# Altium PCB mcu.PcbDoc
Units mil, origin at the board's own origin, x right, y up, seen from the top; angles counter-clockwise.
Board outline 1250 x 1250 mil, 2 copper layers (Top Layer, Bottom Layer); 8 components, 33 nets, 70 pads, 0 vias.
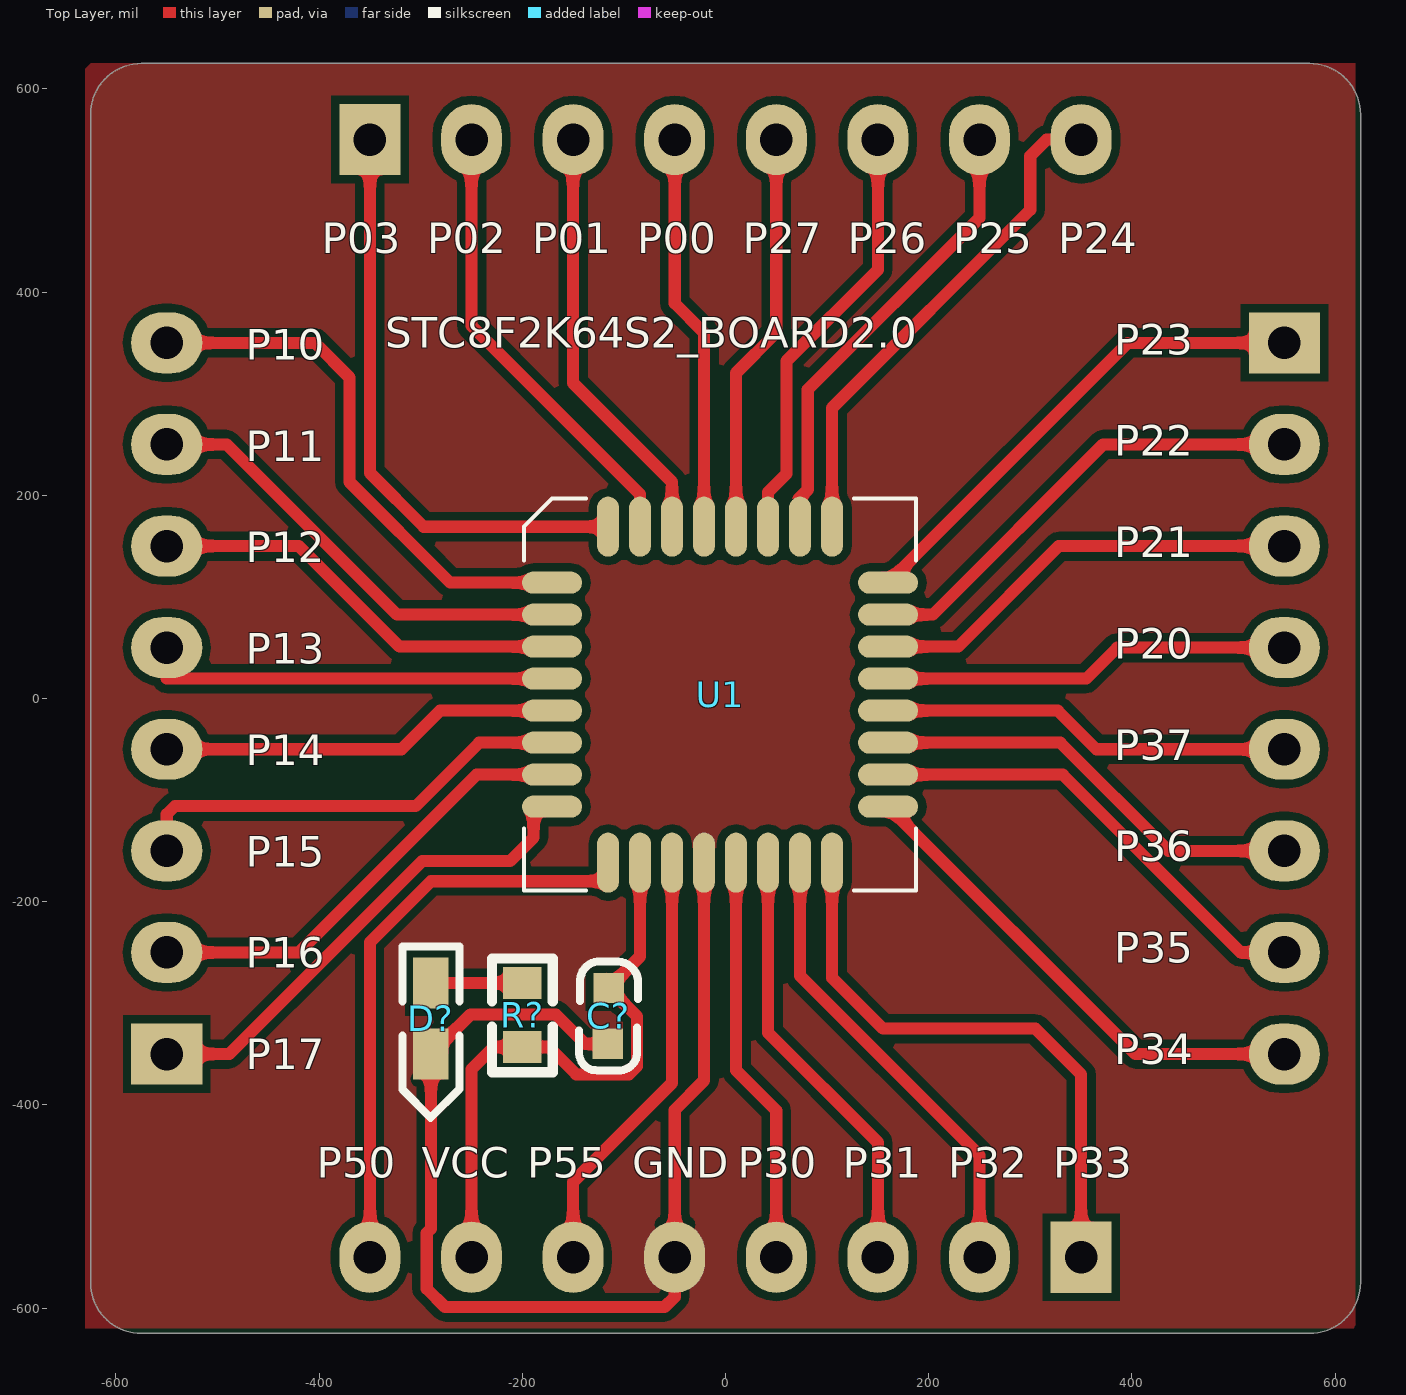
[diagram p0: Top Layer view]
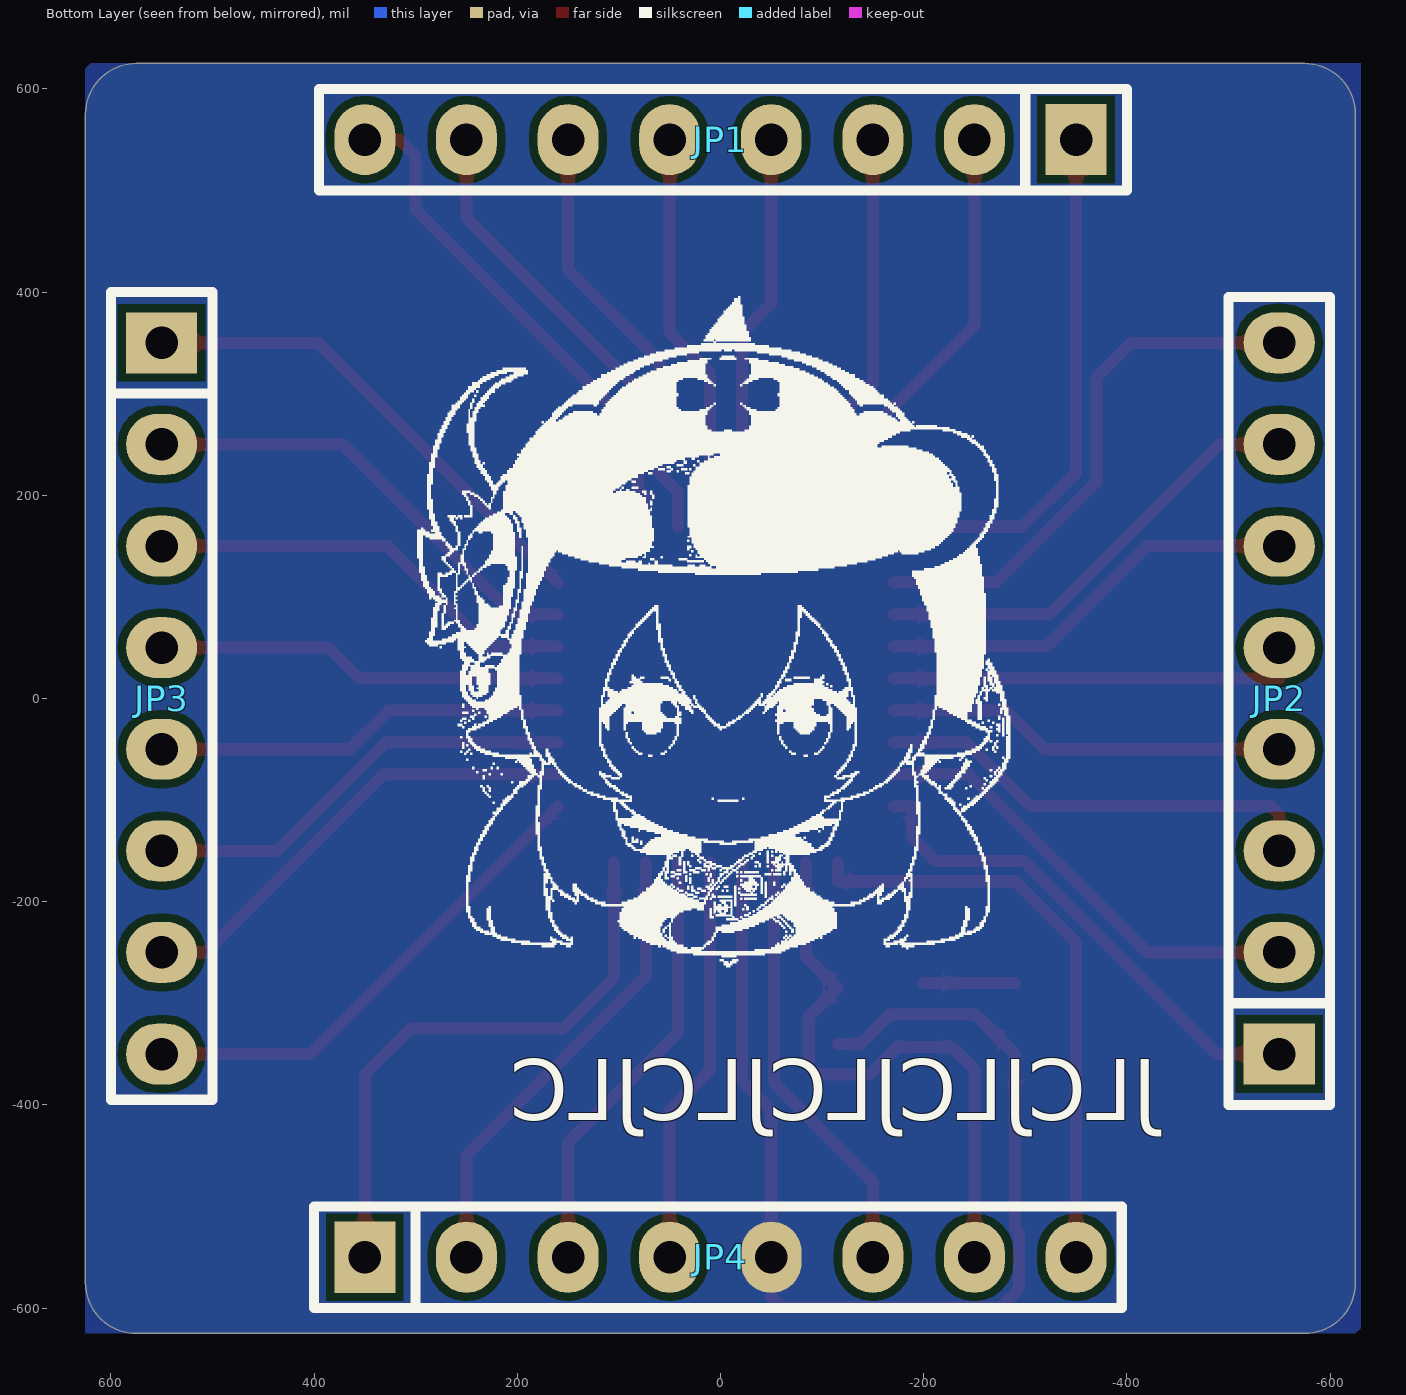
[diagram p1: Bottom Layer view, seen from below]
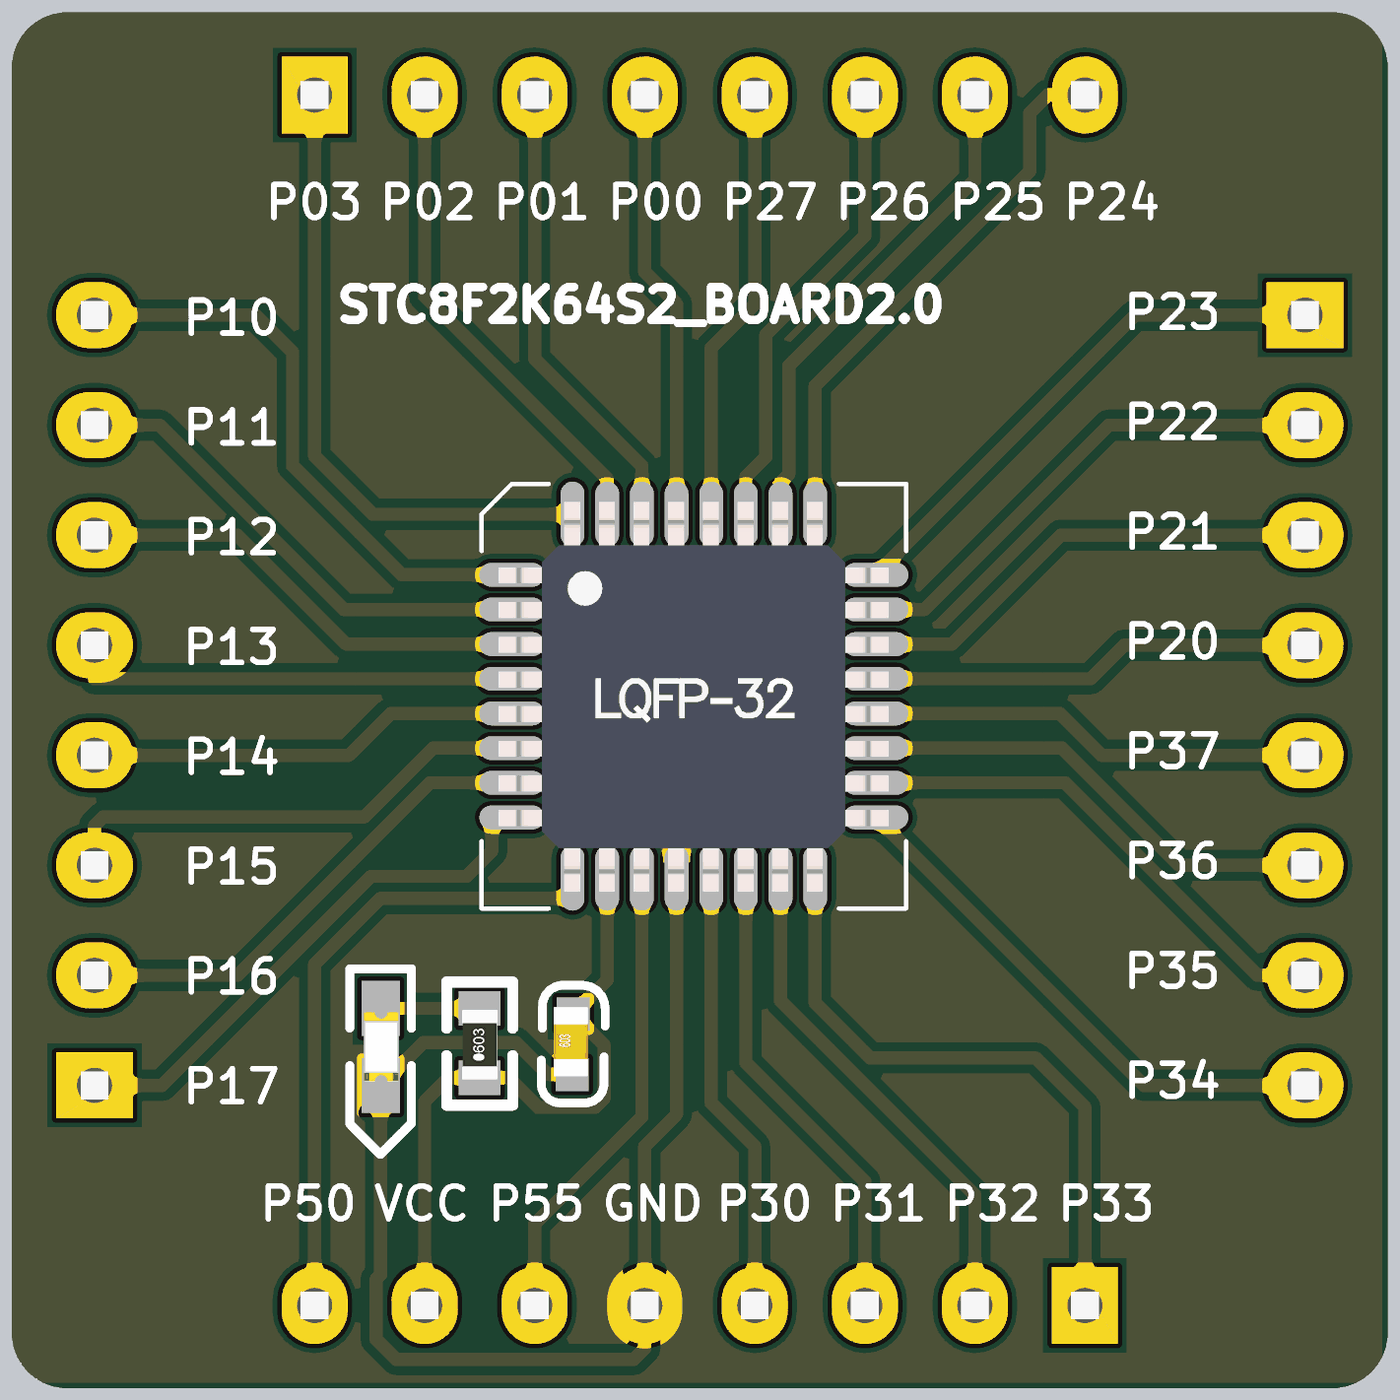
[diagram p2: 3D render of the assembled board from above, using the file's embedded part models]
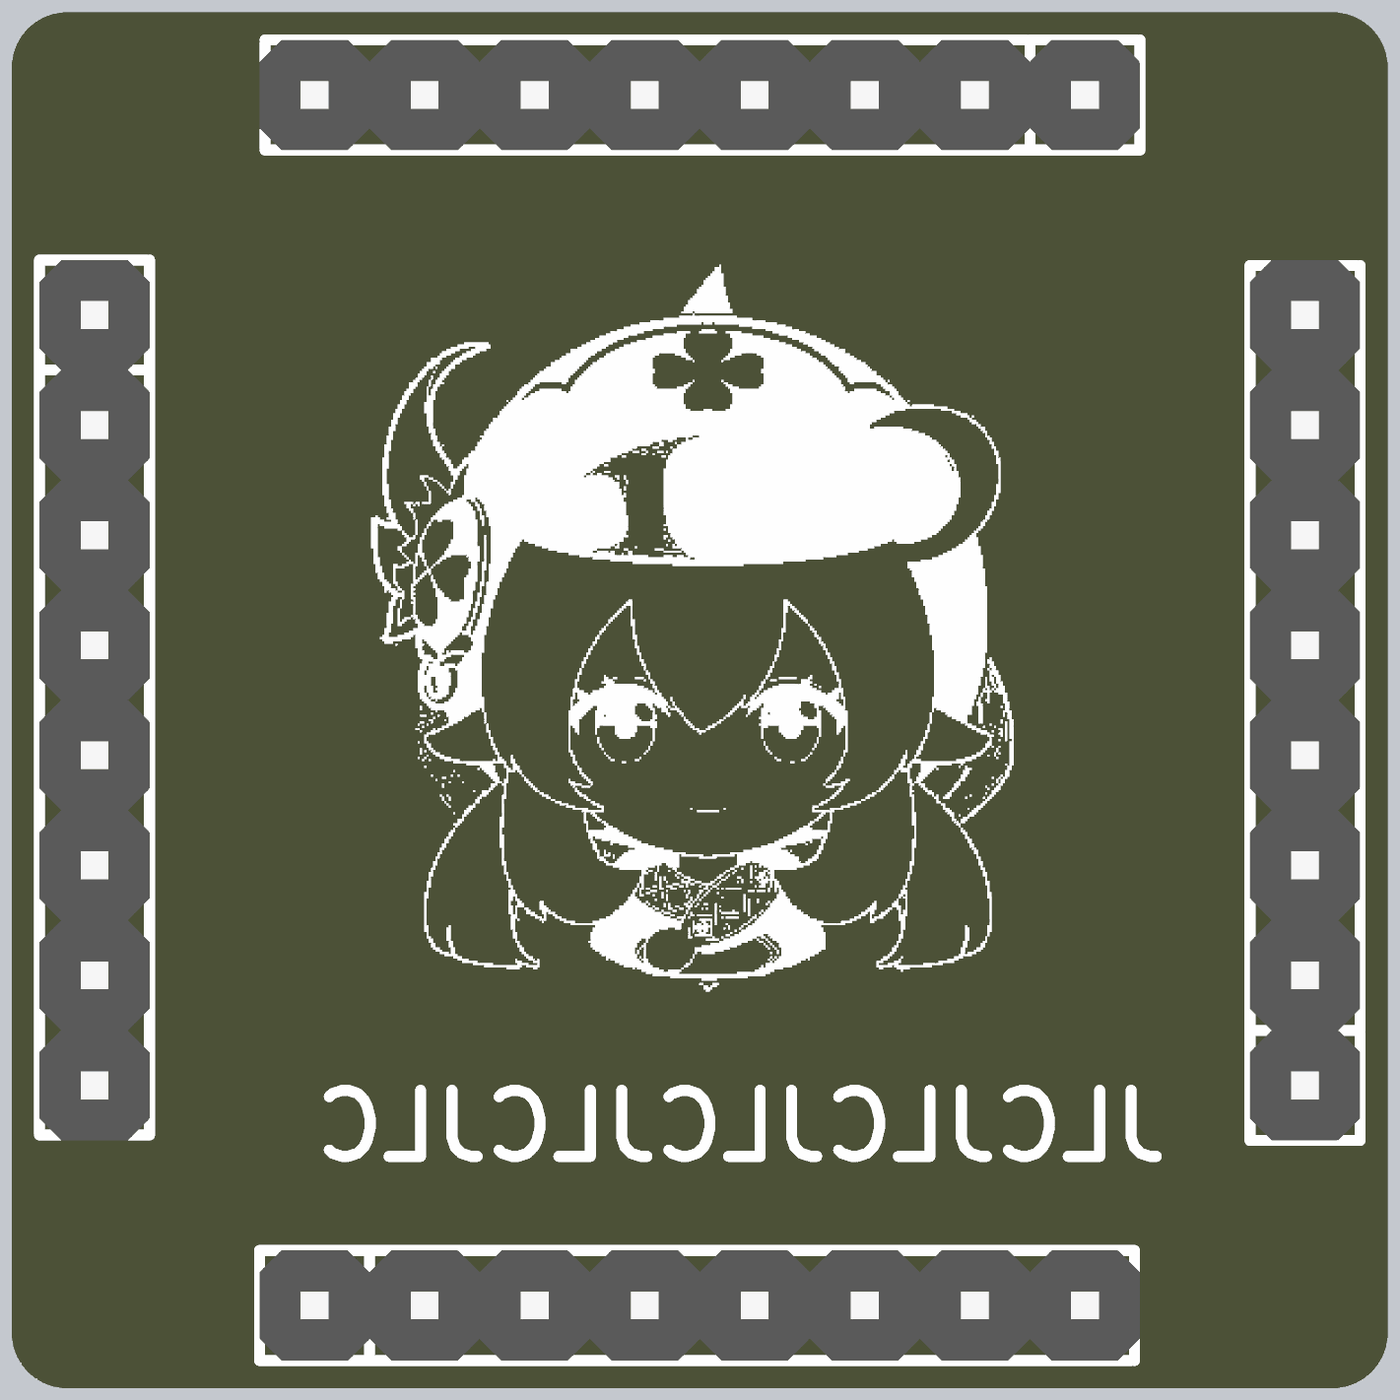
[diagram p3: 3D render of the assembled board from below, using the file's embedded part models]

## Layer stack, top to bottom
Top Solder: solder mask 0.4, Solder Resist, Dk 3.5
Top Layer: signal copper 1.4
Dielectric 1: dielectric 12.6, FR-4, Dk 4.8
Bottom Layer: signal copper 1.4
Bottom Solder: solder mask 0.4, Solder Resist, Dk 3.5

## Board outline
-625,-575 -625,575 cw(c-575,575) -575,625 575,625 cw(c575,575) 625,575 625,-575 cw(c575,-575) 575,-625 -575,-625 cw(c-575,-575)

## Design rules (kind name [scope] priority, off if disabled: settings)
Clearance [All] p1: gap=8 ignorepadtopadclearanceinfootprint=TRUE
PolygonConnect [All] p1: connectstyle=Direct reliefconductorwidth=10 reliefentries=4 polygonreliefangle="90 Angle" airgapwidth=10
RoutingVias [All] p1: holewidth=28 width=50 viastyle="Through Hole" minholewidth=28 minwidth=50 maxholewidth=28 maxwidth=50
SolderMaskExpansion [All] p1: expansion=4 istentingtop=FALSE
Width [All] p1: maxlimit=100 minlimit=8 preferedwidth=12
30 further rules are at their usual default settings.

## Components (designator, comment, footprint, x,y, rotation, side; value= is the part's Value field where it differs from the comment)
C? "CAP" 0603C -116.35,-340.21 r90 top
D? "LED" LED-0603W -290.26,-280 r270 top
JP1 "HDR-1X8" "Pin HDR1X8/2.54mm-S" -350,550 r270 bottom locked
JP2 "HDR-1X8" "Pin HDR1X8/2.54mm-S" -550,-350 r0 bottom locked
JP3 "HDR-1X8" "Pin HDR1X8/2.54mm-S" 550,350 r180 bottom locked
JP4 "HDR-1X8" "Pin HDR1X8/2.54mm-S" 350,-550 r90 bottom locked
R? "RES" 0603R -200,-342.99 r90 top
U1 "STC8F2K64S2_LQFP32" LQFP32 -170.71,113.98 r0 top

## Footprints (in the part's own frame and the unit in brackets; to place one, negate y for a bottom-side part, rotate by r counter-clockwise, add the part's x,y. Pads: shape width x height; smd on the part's side, far side on the other; paste and mask are expansions set on the pad)
0603C [mil]
  rect 30x30 smd: 1(0.21,-0.35) 2(55.21,-1.35)
  silkscreen extent -26,-30 81,28, body extent -1,-15 62,17, height 12
0603R [mm]
  rect 0.8x0.965 smd: 1(0,0) 2(1.6,0)
  silkscreen extent -0.64,-0.76 2.21,0.76, body extent -0.04,-0.41 1.56,0.41, height 0.45
LED-0603W [mil]
  rect 50x35 smd: A(0,0.26) K(70,0.26)
  silkscreen extent -36,-28 133,28, body extent 4,-15 66,17, height 24
LQFP32 [mm]
  oval 1.5x0.55 smd: 1(0,0) 2(0,-0.8) 3(0,-1.6) 4(0,-2.4) 5(0,-3.2) 6(0,-4) 7(0,-4.8) 8(0,-5.6) 17(8.4,-5.6) 18(8.4,-4.8) 19(8.4,-4) 20(8.4,-3.2) 21(8.4,-2.4) 22(8.4,-1.6) 23(8.4,-0.8) 24(8.4,0)
  oval 0.55x1.5 smd: 9(1.4,-7) 10(2.2,-7) 11(3,-7) 12(3.8,-7) 13(4.6,-7) 14(5.4,-7) 15(6.2,-7) 16(7,-7) 25(7,1.4) 26(6.2,1.4) 27(5.4,1.4) 28(4.6,1.4) 29(3.8,1.4) 30(3,1.4) 31(2.2,1.4) 32(1.4,1.4)
  silkscreen extent -0.7,-7.7 9.1,2.1, body extent -0.31,-7.32 8.69,1.68, height 1.63
"Pin HDR1X8/2.54mm-S" [mil]
  rect 70x60 hole 32: 1(0,0)
  oval 70x60 hole 32: 2(0,-100) 3(0,-200) 4(0,-300) 5(0,-400) 6(0,-500) 7(0,-600) 8(0,-700)
  silkscreen extent -50,-745 50,50, body extent -50,-750 50,50, height 336

## Part data
C?: "无极性电容"
JP1 JP2 JP3 JP4: library part "Header 8", "8P接插件", BOM名称=8P接插件, 学习资源=https://shop463601444.taobao.com, 版权归属="封装库来自淘宝 ID：黄晶宝石"

## Nets (pads, with @x,y where several pads share a name; then routed paths per layer and width w, separated by ;. In a path a pad name is that pad's centre, name@x,y a point inside that pad or via, vN(x,y) a via of type N, cw(c..) or ccw(c..) an arc to the next point about the centre after c; other vN are vias at no path point)
GND: C?.1 D?.K JP4.5 U1.12 | length 1129.8
  Top Layer w12: C?.1 -138,-340 -167,-311 -251,-311 D?.K -290,-522 -294,-526 -294,-581 -276,-599 -60,-599 -50,-589 JP4.5 -50,-405 -21.1,-376.1 U1.12
NetD?_A: D?.A R?.2 | length 90
  Top Layer w12: D?.A R?.2
P00: JP1.4 U1.29 | length 392.9
  Top Layer w12: JP1.4 -50,388.9 -21.1,360 U1.29
P01: JP1.3 U1.30 | length 421.3
  Top Layer w12: JP1.3 -150,310.4 -52.6,213 U1.30
P02: JP1.2 U1.31 | length 449.6
  Top Layer w12: JP1.2 -250,366.91 -84.09,201 U1.31
P03: JP1.1 U1.32 | length 584.5
  Top Layer w12: JP1.1 -350,222 -297,169 -115.59,169 U1.32
P10: JP2.8 U1.1 | length 537.4
  Top Layer w12: JP2.8 -404,350 -370,316 -370,213 -270.98,113.98 U1.1
P11: JP2.7 U1.2 | length 448.7
  Top Layer w12: JP2.7 -491,250 -323.48,82.48 U1.2
P12: JP2.6 U1.3 | length 420.3
  Top Layer w12: JP2.6 -420,150 -320.98,50.98 U1.3
P13: JP2.5 U1.4 | length 409.8
  Top Layer w12: JP2.5 -550,19.49 U1.4
P14: JP2.4 U1.5 | length 395
  Top Layer w12: JP2.4 -319,-50 -281.01,-12.01 U1.5
P15: JP2.3 U1.6 | length 444.5
  Top Layer w12: JP2.3 -550,-114 -542,-106 -305,-106 -242.5,-43.5 U1.6
P16: JP2.2 U1.7 | length 451.8
  Top Layer w12: JP2.2 -420,-250 -245,-75 U1.7
P17: JP2.1 U1.8 | length 498
  Top Layer w12: JP2.1 -488.5,-350 -298.5,-160 -212,-160 -189,-137 -189,-106.5 U1.8
P20: JP3.4 U1.21 | length 402.6
  Top Layer w12: U1.21 355,19.49 385.51,50 JP3.4
P21: JP3.3 U1.22 | length 431
  Top Layer w12: U1.22 228.98,50.98 328,150 JP3.3
P22: JP3.2 U1.23 | length 459.4
  Top Layer w12: U1.23 204,82.48 371.52,250 JP3.2
P23: JP3.1 U1.24 | length 487.8
  Top Layer w12: U1.24 396.02,350 JP3.1
P24: JP1.8 U1.25 | length 502.4
  Top Layer w12: U1.25 104.88,285.94 300,481.06 300,534 316,550 JP1.8
P25: JP1.7 U1.26 | length 454.1
  Top Layer w12: U1.26 73.39,198.1 81,205.71 81,304 250,473 JP1.7
P26: JP1.6 U1.27 | length 425.7
  Top Layer w12: U1.27 41.89,203 60.05,221.16 60.05,332.05 150,422 JP1.6
P27: JP1.5 U1.28 | length 397.3
  Top Layer w12: U1.28 10.39,320.39 50,360 JP1.5
P30: JP4.4 U1.13 | length 404.8
  Top Layer w12: U1.13 10.39,-366 50,-405.61 JP4.4
P31: JP4.3 U1.14 | length 433.2
  Top Layer w12: U1.14 41.89,-329 150,-437.11 JP4.3
P32: JP4.2 U1.15 | length 461.5
  Top Layer w12: U1.15 73.39,-273 250,-449.61 JP4.2
P33: JP4.1 U1.16 | length 577.9
  Top Layer w12: U1.16 104.88,-275 154.88,-325 305,-325 350,-370 JP4.1
P34: JP3.8 U1.17 | length 490.9
  Top Layer w12: U1.17 403.5,-350 JP3.8
P35: JP3.7 U1.18 | length 462.5
  Top Layer w12: U1.18 332,-75 507,-250 JP3.7
P36: JP3.6 U1.19 | length 434.1
  Top Layer w12: U1.19 329.5,-43.5 436,-150 JP3.6
P37: JP3.5 U1.20 | length 405.7
  Top Layer w12: U1.20 327.01,-12.01 365,-50 JP3.5
P54: JP4.8 U1.9 | length 587.6
  Top Layer w12: JP4.8 -350,-240 -290,-180 -115.59,-180 U1.9
P55: JP4.6 U1.11 | length 428.7
  Top Layer w12: JP4.6 -150,-476 -52.6,-378.6 U1.11
VCC: C?.2 JP4.7 R?.1 U1.10 | length 596.4
  Top Layer w12: JP4.7 -250,-364.99 -228,-342.99 R?.1 -174.01,-342.99 -147,-370 -95,-370 -87,-362 -87,-313 C?.2 -84.09,-254.09 U1.10

## Polygon pours and split planes (outlines as drawn)
GND on Top Layer "GND_L01_P000" (solid, remove dead copper, pour order 0): -625,625 -630,620 -630,-620 625,-620 620,-615 620,625
GND on Bottom Layer "GND_L02_P001" (solid, remove dead copper, pour order 1): -630,625 -630,-620 -625,-625 625,-625 625,620 620,625

## Silkscreen, mask and mechanical layers (free items; w line width, h text height)
Top Overlay:
  text "P03" at -397.39,438.43 h30
  text "P02" at -293.82,438.43 h30
  text "P01" at -190.24,438.43 h30
  text "P00" at -86.67,438.43 h30
  text "P27" at 16.9,438.43 h30
  text "P26" at 120.47,438.43 h30
  text "P25" at 224.04,438.43 h30
  text "P24" at 327.61,438.43 h30
  text "STC8F2K64S2_BOARD2.0" at -335,345 h30
  text "P23" at 382.61,338.43 h30
  text "P10" at -472.39,333.43 h30
  text "P22" at 382.61,238.65 h30
  text "P11" at -472.39,233.65 h30
  text "P21" at 382.61,138.88 h30
  text "P12" at -472.39,133.88 h30
  text "P20" at 382.61,39.1 h30
  text "P13" at -472.39,34.1 h30
  text "P37" at 382.61,-60.67 h30
  text "P14" at -472.39,-65.67 h30
  text "P36" at 382.61,-160.45 h30
  text "P15" at -472.39,-165.45 h30
  text "P35" at 382.61,-260.22 h30
  text "P16" at -472.39,-265.22 h30
  text "P34" at 382.61,-360 h30
  text "P17" at -472.39,-365 h30
  text "P50" at -402.39,-471.57 h30
  text "VCC" at -298.82,-471.57 h30
  text "P55" at -195.24,-471.57 h30
  text "GND" at -91.67,-471.57 h30
  text "P30" at 11.9,-471.57 h30
  text "P31" at 115.47,-471.57 h30
  text "P32" at 219.04,-471.57 h30
  text "P33" at 322.61,-471.57 h30
Bottom Overlay:
  drawing of 363 lines, arcs and shapes, not listed
  text "JLCJLCJLCJLCJLC" at -430,-415 h60
Mechanical 1:
  the board outline again, w10